# EAGLE board table_light_shield (EAGLE 6.6.0)
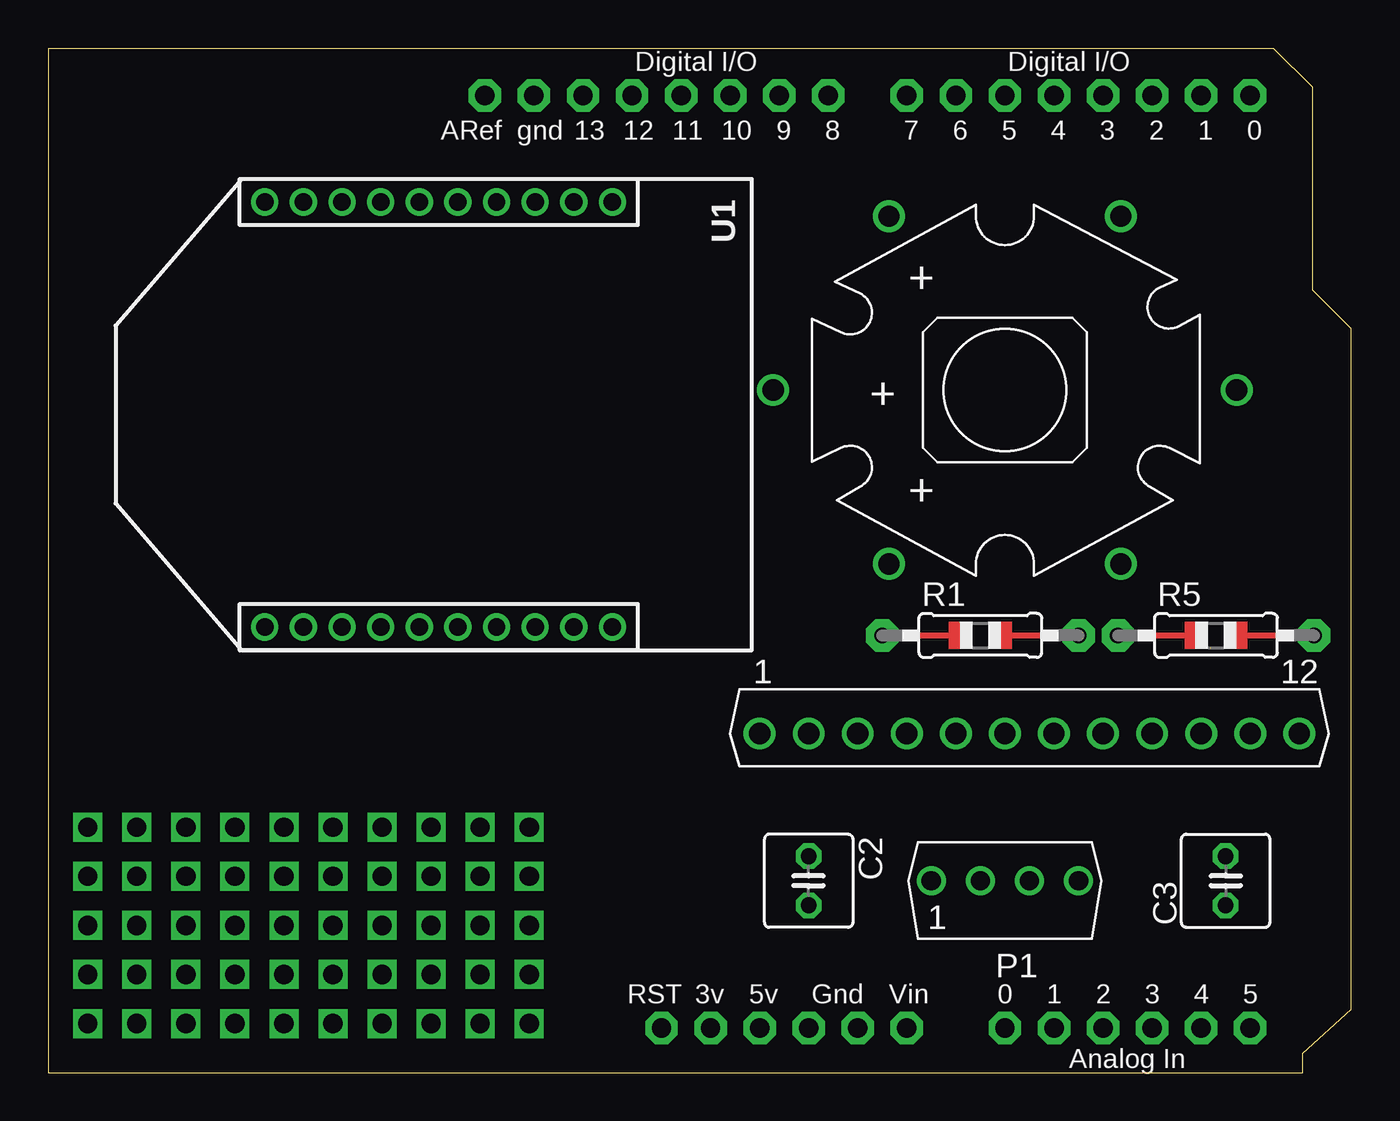
[diagram p0: board, top side]
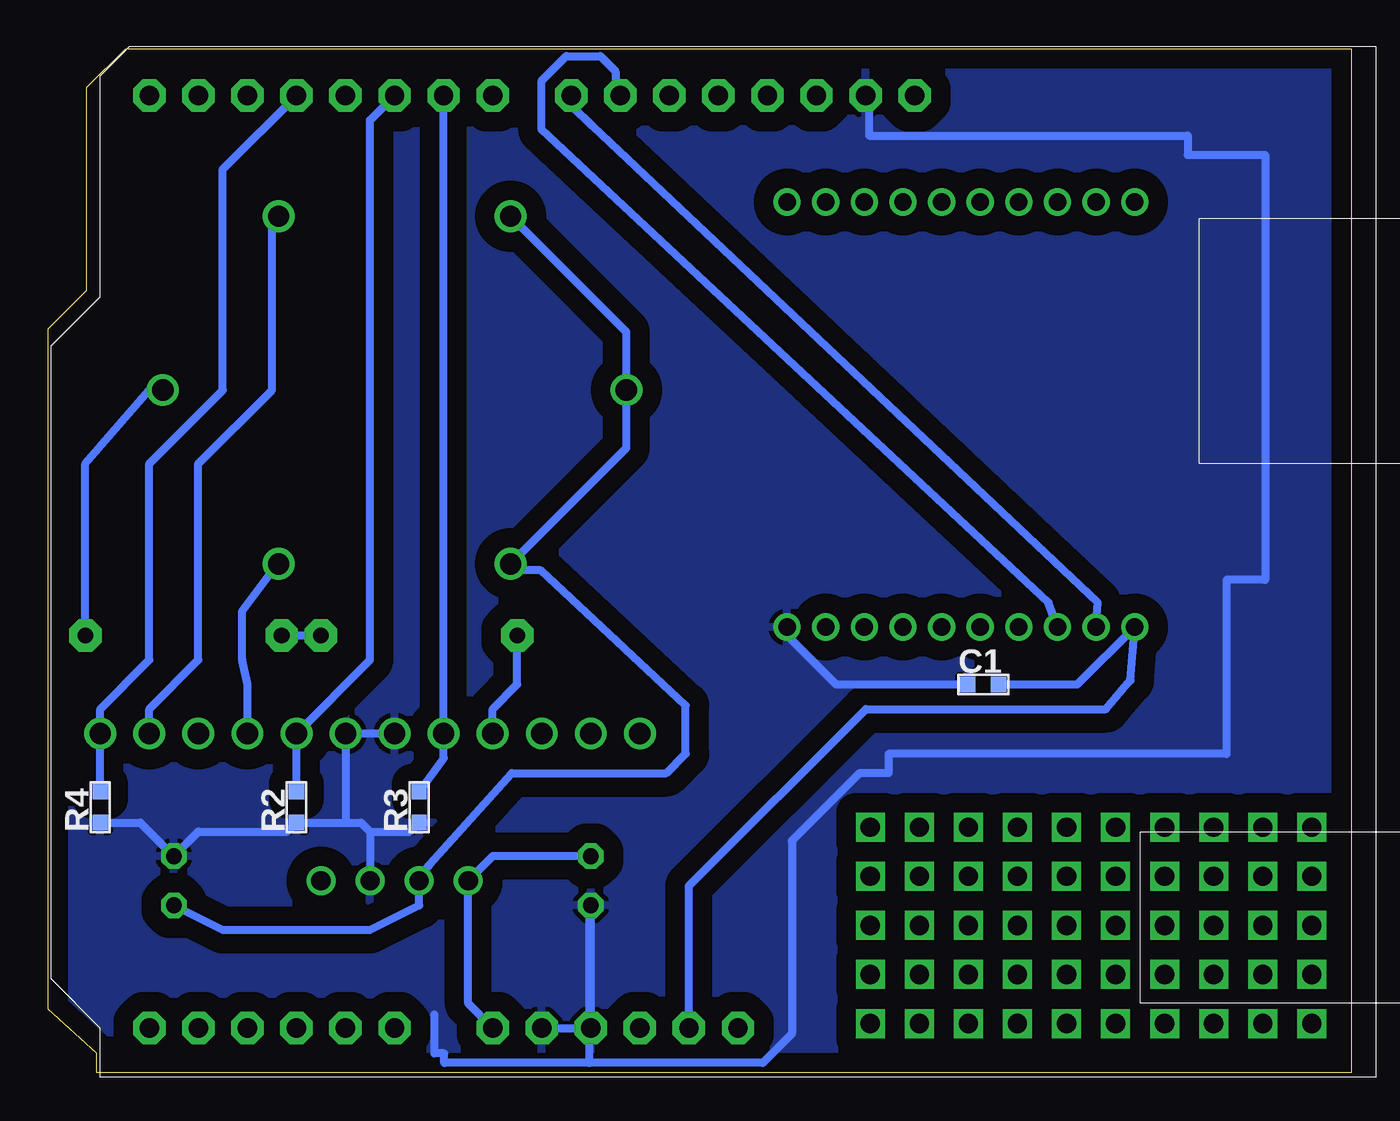
[diagram p1: board, bottom side, seen from below]

Size 67.46 x 53 mm. Coordinates in mm from the lower left corner, seen from the top.
Outline: 0,0 64.96,0 64.96,1 67.46,3.27 67.46,38.5 65.46,40.5 65.46,51 63.46,53 0,53 0,0
Copper layers (1*16): Top 0.035mm / dielectric 1.5mm / Bottom 0.035mm
Design rules "default": minimum track width 10mil, minimum drill 24mil, track to track 8mil, track to pad 8mil, pad to pad 8mil, via to via 8mil, smd to smd 8mil, copper to edge 40mil, drill to drill 8mil, minimum pad ring 10mil, minimum via ring 8mil, stop-mask expansion 4mil, vias tented up to drill 0mil, thermal gap 10mil

## Footprints (pad centres in the part's own frame; a part is rotated, then mirrored left to right if it is on the bottom)
1608(1.6*0.8MM) = smd 0.8 x 0.8: P$1 0.8,0; P$2 -0.8,0
C025-050X050 = drill 0.813 octagon: 1 -1.27,0; 2 1.27,0
OSTCXBC1C1S_WITH_HEATSINK = drill 1.1: B+ -6,9; B- 6,9; G+ -6,-9; G- 6,-9; R+ -12,0; R- 12,0
PQ3RD23 = drill 1: 1 -3.81,0; 2 -1.27,0; 3 1.27,0; 4 3.81,0
MP4401 = drill 1.1: 1 -13.97,0; 2 -11.43,0; 3 -8.89,0; 4 -6.35,0; 5 -3.81,0; 6 -1.27,0; 7 1.27,0; 8 3.81,0; 9 6.35,0; 10 8.89,0; 11 11.43,0; 12 13.97,0
0805-THM = drill 0.813 pad 1.676 octagon: 1 -5.08,0; 2 5.08,0
1608(1.6*0.8MM)' = smd 0.8 x 0.8: P$3 -0.8,0; P$4 0.8,0
XBEE_ON_XPPN101BFCN-RC = drill 0.9: 1 -11,18; 2 -11,16; 3 -11,14; 4 -11,12; 5 -11,10; 6 -11,8; 7 -11,6; 8 -11,4; 9 -11,2; 10 -11,0; 11 11,0; 12 11,2; 13 11,4; 14 11,6; 15 11,8; 16 11,10; 17 11,12; 18 11,14; 19 11,16; 20 11,18
ARDUINO-NOHOLE = drill 1 pad 1.676 octagon: 3V 35.56,2.54; 5V 38.1,2.54; A0 50.8,2.54; A1 53.34,2.54; A2 55.88,2.54; A3 58.42,2.54; A4 60.96,2.54; A5 63.5,2.54; AREF 23.876,50.8; D0 63.5,50.8; D1 60.96,50.8; D2 58.42,50.8; D3 55.88,50.8; D4 53.34,50.8; D5 50.8,50.8; D6 48.26,50.8; D7 45.72,50.8; D8 41.656,50.8; D9 39.116,50.8; D10 36.576,50.8; D11 34.036,50.8; D12 31.496,50.8; D13 28.956,50.8; GND 26.416,50.8; GND1 43.18,2.54; GND2 40.64,2.54; RESET 33.02,2.54; VIN 45.72,2.54

## Placement (x,y rotation side)
C1  [1608(1.6*0.8MM)]  19.05,20.09 0 bottom
C2  50u  [C025-050X050]  39.37,9.93 270 top
C3  50u  [C025-050X050]  60.96,9.93 90 top
LED1  OSTCXBC1C1S  [OSTCXBC1C1S_WITH_HEATSINK]  49.53,35.33 0 top
P1  PQ3RD23  [PQ3RD23]  49.53,9.93 0 top
Q1  MP4401  [MP4401]  50.8,17.55 0 top
R1  1  [0805-THM]  48.26,22.63 0 top
R2  10k  [1608(1.6*0.8MM)']  54.61,13.74 90 bottom
R3  10k  [1608(1.6*0.8MM)']  48.26,13.74 90 bottom
R4  10k  [1608(1.6*0.8MM)']  64.77,13.74 90 bottom
R5  1  [0805-THM]  60.46,22.63 0 top
U1  XBEE_PROXPPN101BFCN  [XBEE_ON_XPPN101BFCN-RC]  29.21,34.06 90 top
U$1  ARDUINO-NOHOLE  [ARDUINO-NOHOLE]  -1.27,-0.23 0 top

## Library data of the parts
C1 = Capasitor
C2 C3 = rcl
LED1 = LED
P1 = Voltage Regulator
Q1 = FET n-ch
R1 R5 U$1 = adafruit
R2-R4 = Resistor
U1 = ZigBee Modules

## Nets
5V: U$1.5V
GND: C1.P$2 C2.2 C3.2 P1.3 Q1.6 Q1.7 R2.P$3 R3.P$3 R4.P$3 U1.10 U$1.GND U$1.GND1 U$1.GND2
N$1: C2.1 P1.1 U$1.VIN
N$2: Q1.4 R1.1
N$3: Q1.5 R3.P$4 U$1.D6
N$4: Q1.8 R2.P$4 U$1.D5
N$5: Q1.12 R4.P$4 U$1.D3
N$6: C1.P$1 U1.1 U$1.3V
N$7: U1.2 U$1.D8
N$8: U1.3 U$1.D9
N$9: LED1.B- Q1.11
N$10: LED1.R- R5.2
N$11: R1.2 R5.1
N$13: C3.1 LED1.B+ LED1.G+ LED1.R+ P1.2
N$14: LED1.G- Q1.9

## Tracks (layer width: path | path; a pad name or v marks a point on that pad's centre or on a via)
GND
  Bottom 0.406: U$1.GND1 U$1.GND2 C2.2 39.46,8.66 39.46,0.5 | 52.07,12.94 R2.P$3 55.08,12.47 59.69,12.47 C3.2 62.7,12.94 R4.P$3 | 52.07,12.94 51.27,12.94 50.8,12.47 | 50.8,12.47 P1.3 | 50.8,12.47 48.73,12.47 R3.P$3 | Q1.6 Q1.7 52.07,12.94 | U1.10 29.21,22.63 26.67,20.09 C1.P$2 | 39.46,0.5 46.96,0.5 46.96,1 47.46,1 47.46,3 | U$1.GND 24.96,50.57 24.96,48.5 8.46,48.5 8.46,47.5 4.46,47.5 4.46,25.5 6.46,25.5 6.46,16.5 23.96,16.5 23.96,15.5 25.46,15.5 28.96,12 28.96,2 30.46,0.5 39.46,0.5
  pour Bottom (isolate 1.016): -0.04,1 -0.04,53.5 62.96,53.5 64.96,51.5 64.96,40 67.46,37.5 67.46,4.5 64.96,2 64.46,1.5 64.46,0.5 63.96,0 -0.04,0
N$1
  Bottom 0.406: C2.1 44.45,11.2 P1.1 45.72,3.58 U$1.VIN
N$2
  Bottom 0.406: Q1.4 44.45,18.82 43.18,20.09 R1.1
N$3
  Bottom 0.406: R3.P$4 46.99,16.28 Q1.5 U$1.D6
N$4
  Bottom 0.406: R2.P$4 Q1.8 50.8,21.36 50.8,49.3 U$1.D5
N$5
  Bottom 0.406: R4.P$4 Q1.12 64.77,18.82 62.23,21.36 62.23,31.52 58.42,35.33 58.42,46.76 U$1.D3
N$6
  Bottom 0.406: U$1.3V 34.29,9.66 25.13,18.82 12.7,18.82 11.43,20.3 U1.1 14.18,20.09 C1.P$1
N$7
  Bottom 0.406: U1.2 13.13,24.33 39.29,48.99 40.33,50.01 U$1.D8
N$8
  Bottom 0.406: U1.3 15.67,24.33 41.91,48.8 41.91,51.34 40.64,52.61 38.87,52.61 38.1,51.84 38.1,50.82 U$1.D9
N$9
  Bottom 0.406: Q1.11 62.23,18.82 59.69,21.36 59.69,31.52 55.88,35.33 55.88,43.98 LED1.B-
N$10
  Bottom 0.406: R5.2 65.54,31.52 62.23,35.33 LED1.R-
N$11
  Bottom 0.406: R5.1 R1.2
N$12  (via drill 1)
  other vias: 14.74,12.7
N$13
  Bottom 0.406: C3.1 58.42,7.39 50.8,7.39 48.26,8.66 P1.2 47.76,10.7 47.96,10.5 43.46,15.5 35.46,15.5 34.46,16.5 34.46,19 41.96,26 43.46,26 LED1.G+ 37.53,32.33 LED1.R+ 37.53,38.33 LED1.B+
N$14
  Bottom 0.406: Q1.9 57.15,20.09 57.42,21.36 57.42,23.9 55.88,25.98 LED1.G-
N$15  (via drill 1)
  other vias: 17.28,12.7
N$16  (via drill 1)
  other vias: 19.82,12.7
N$17  (via drill 1)
  other vias: 22.36,12.7
N$18  (via drill 1)
  other vias: 24.9,12.7
N$19  (via drill 1)
  other vias: 14.74,10.16
N$20  (via drill 1)
  other vias: 17.28,10.16
N$21  (via drill 1)
  other vias: 19.82,10.16
N$22  (via drill 1)
  other vias: 22.36,10.16
N$23  (via drill 1)
  other vias: 24.9,10.16
N$24  (via drill 1)
  other vias: 24.9,7.62
N$25  (via drill 1)
  other vias: 22.36,7.62
N$26  (via drill 1)
  other vias: 19.82,7.62
N$27  (via drill 1)
  other vias: 17.28,7.62
N$28  (via drill 1)
  other vias: 14.74,7.62
N$29  (via drill 1)
  other vias: 14.74,5.08
N$30  (via drill 1)
  other vias: 17.28,5.08
N$31  (via drill 1)
  other vias: 19.82,5.08
N$32  (via drill 1)
  other vias: 22.36,5.08
N$33  (via drill 1)
  other vias: 24.9,5.08
N$34  (via drill 1)
  other vias: 24.9,2.54
N$35  (via drill 1)
  other vias: 22.36,2.54
N$36  (via drill 1)
  other vias: 19.82,2.54
N$37  (via drill 1)
  other vias: 17.28,2.54
N$38  (via drill 1)
  other vias: 14.74,2.54
N$39  (via drill 1)
  other vias: 12.2,2.54
N$40  (via drill 1)
  other vias: 12.2,5.08
N$41  (via drill 1)
  other vias: 12.2,7.62
N$42  (via drill 1)
  other vias: 12.2,10.16
N$43  (via drill 1)
  other vias: 12.2,12.7
N$44  (via drill 1)
  other vias: 2.04,12.7
N$45  (via drill 1)
  other vias: 9.66,10.16
N$46  (via drill 1)
  other vias: 9.66,7.62
N$47  (via drill 1)
  other vias: 9.66,5.08
N$48  (via drill 1)
  other vias: 9.66,2.54
N$49  (via drill 1)
  other vias: 2.04,2.54
N$50  (via drill 1)
  other vias: 4.58,2.54
N$51  (via drill 1)
  other vias: 7.12,2.54
N$52  (via drill 1)
  other vias: 4.58,5.08
N$53  (via drill 1)
  other vias: 2.04,5.08
N$54  (via drill 1)
  other vias: 2.04,7.62
N$55  (via drill 1)
  other vias: 4.58,7.62
N$56  (via drill 1)
  other vias: 7.12,5.08
N$57  (via drill 1)
  other vias: 7.12,7.62
N$58  (via drill 1)
  other vias: 4.58,10.16
N$59  (via drill 1)
  other vias: 7.12,10.16
N$60  (via drill 1)
  other vias: 9.66,12.7
N$61  (via drill 1)
  other vias: 7.12,12.7
N$62  (via drill 1)
  other vias: 4.58,12.7
N$63  (via drill 1)
  other vias: 2.04,10.16